# Altium PCB Сharger for auto (2).PcbDoc
Units mm, origin at the board's own origin, x right, y up, seen from the top; angles counter-clockwise.
Board outline 35.56 x 29.46 mm, 2 copper layers (Top Layer, Bottom Layer); 17 components, 20 nets, 60 pads, 0 vias.
Unrouted connection lines stored in the file: 19.
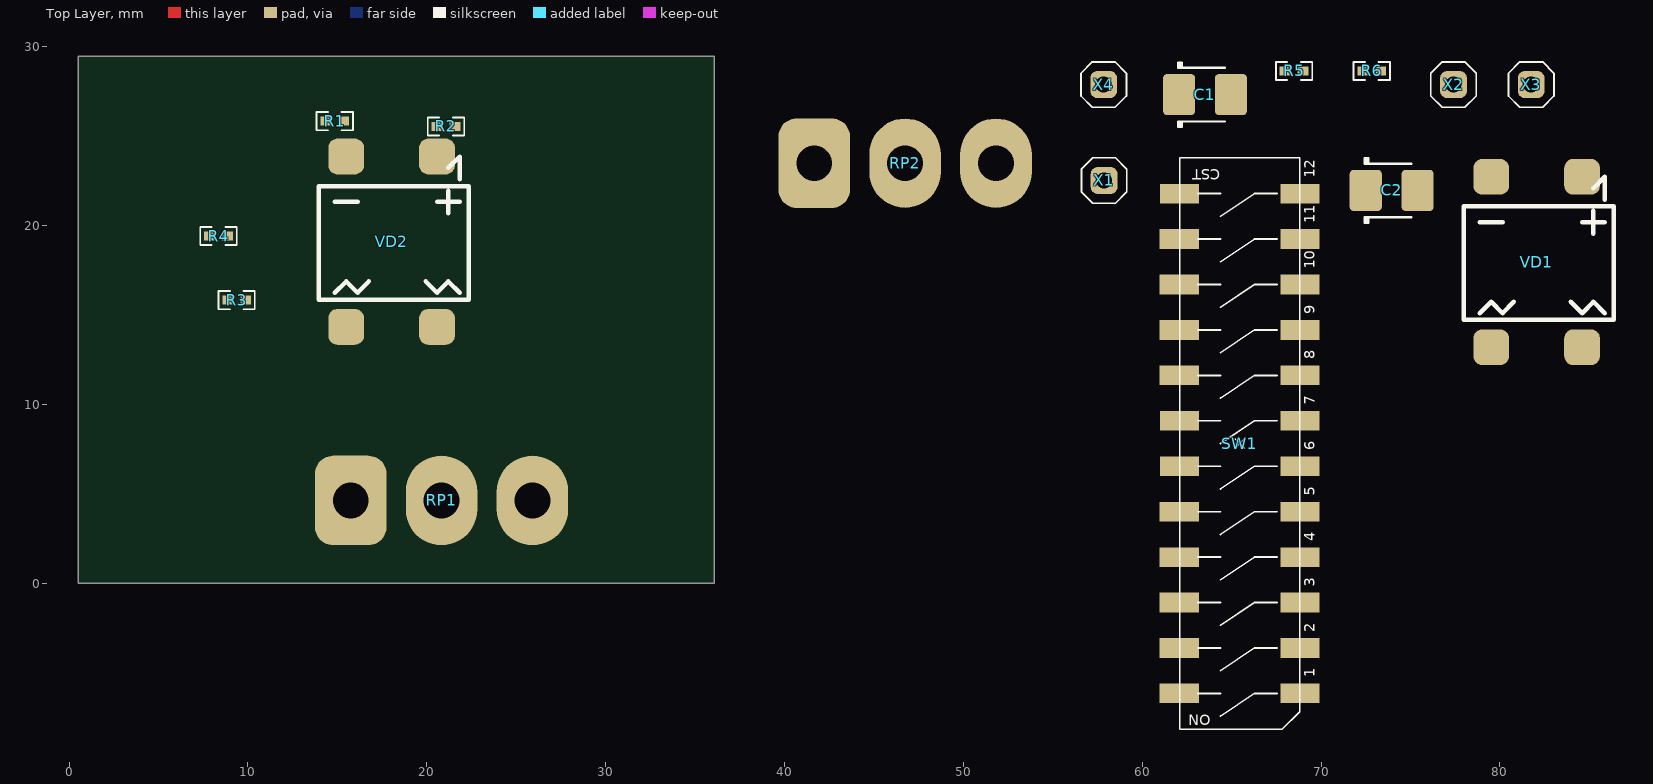
[diagram p0: Top Layer view]
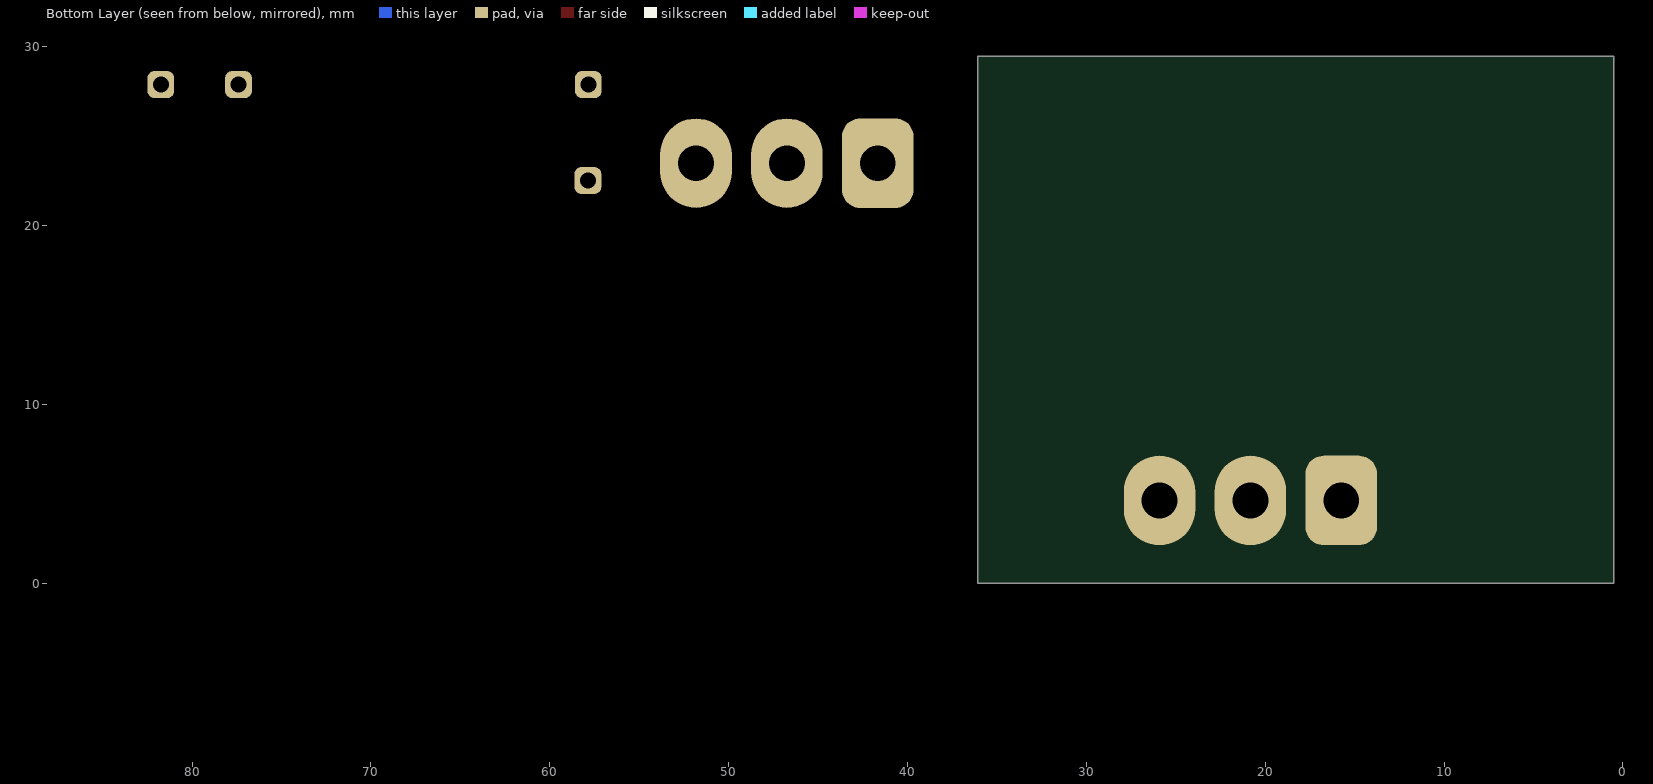
[diagram p1: Bottom Layer view, seen from below]

## Layer stack, top to bottom
Top Solder: solder mask 0.0102, Solder Resist, Dk 3.5
Top Layer: signal copper 0.0356
Dielectric 1: dielectric 0.32, FR-4, Dk 4.8
Bottom Layer: signal copper 0.0356
Bottom Solder: solder mask 0.0102, Solder Resist, Dk 3.5

## Board outline
0.508,0 0.508,29.464 36.068,29.464 36.068,0

## Design rules (kind name [scope] priority, off if disabled: settings)
Clearance InPoly [InPoly] p1: gap=0.25 ignorepadtopadclearanceinfootprint=FALSE except(0: Arc-Hole Track-Hole SMDPad-Hole THPad-Hole Via-Hole Fill-Hole Poly-Hole Region-Hole Text-Hole)
Clearance [All] p2: gap=0.15 ignorepadtopadclearanceinfootprint=FALSE except(0: Arc-Hole Track-Hole SMDPad-Hole THPad-Hole Via-Hole Fill-Hole Poly-Hole Region-Hole Text-Hole)
PolygonConnect [All] p1: connectstyle=Relief reliefconductorwidth=0.254 reliefentries=4 polygonreliefangle="90 Angle" airgapwidth=0.254
RoutingVias [All] p1: holewidth=0.5 width=0.7 viastyle="Through Hole" minholewidth=0.3 minwidth=0.5 maxholewidth=1 maxwidth=1.5
SolderMaskExpansion [All] p1: expansion=0.102
Width [All] p1: maxlimit=0.5 minlimit=0.15 preferedwidth=0.25
30 further rules are at their usual default settings.

## Components (designator, comment, footprint, x,y, rotation, side; value= is the part's Value field where it differs from the comment)
C1 "4700uf 50V" CAPMP3528X210N 63.508,27.313 r0 top
C2 "4700uf 50V" CAPMP3528X210N 73.948,21.954 r0 top
R1 "RESC1005(0402)" "REZKemet 0402" 14.859,25.832 r0 top
R2 "RESC1005(0402)" "REZKemet 0402" 21.074,25.532 r180 top
R3 "RESC1005(0402)" "REZKemet 0402" 9.373,15.824 r0 top
R4 "RESC1005(0402)" "REZKemet 0402" 8.357,19.406 r0 top
R5 "0" "REZKemet 0402" 68.487,28.634 r0 top
R6 "0" "REZKemet 0402" 72.83,28.634 r0 top
RP1 "CC" POT16K1-LIN 20.828,4.623 r0 top
RP2 "CV" POT16K1-LIN 46.744,23.478 r0 top
SW1 "219-12MST" 219-12MST 68.817,-6.164 r90 top
VD1 "Bridge3" DF206ST-G 79.51,13.191 r0 top
VD2 "Bridge3" DF206ST-G 15.494,14.326 r0 top
X1 "X1-PLS-1" HoleSolderPLS-1 57.869,22.513 r0 top
X2 "X1-PLS-1" HoleSolderPLS-1 77.402,27.872 r0 top
X3 "X1-PLS-1" HoleSolderPLS-1 81.745,27.872 r0 top
X4 "X1-PLS-1" HoleSolderPLS-1 57.844,27.872 r0 top

## Footprints (in the part's own frame and the unit in brackets; to place one, negate y for a bottom-side part, rotate by r counter-clockwise, add the part's x,y. Pads: shape width x height; smd on the part's side, far side on the other; paste and mask are expansions set on the pad)
219-12MST [mm] "SWITCH SLIDE DIP SPST 100MA 20V"
  rect 1.1x2.2 smd: 1(0,0) 2(0,6.74) 3(2.54,0) 4(2.54,6.74) 5(5.08,0) 6(5.08,6.74) 7(7.62,0) 8(7.62,6.74) 9(10.16,0) 10(10.16,6.74) 11(12.7,0) 12(12.7,6.73) 13(15.24,0) 14(15.24,6.73) 15(17.78,0) 16(17.78,6.74) 17(20.32,0) 18(20.32,6.74) 19(22.86,0) 20(22.86,6.74) 21(25.4,0) 22(25.4,6.74) 23(27.94,0) 24(27.94,6.73)
  silkscreen extent -2,0.01 29.94,6.71
CAPMP3528X210N [mm] "Molded body capacitor, Body 3.5x2.8mm, 1210, IPC Nominal settings"
  round 0.254 on Mech15: 0(0,0)
  rrect25% 1.8x2.3 smd: 1(-1.45,0) 2(1.45,0)
  Top Layer pour cut-out: -0.508,1.27 0.508,1.27 0.508,-1.27 -0.508,-1.27
  silkscreen extent -1.5,-1.8 1.1,1.8, body extent -1.75,-1.4 1.75,1.4, height 2.1
DF206ST-G [mm] "SMD Glass Passivated Bridge Rectifiers, 600V 2A, Package DFS"
  rrect50% 2x2 smd: 1(5.08,9.525) 2(0,9.525) 3(0,0) 4(5.08,0)
  silkscreen extent -1.52,1.52 6.86,9.53, body extent -1.5,-0.5 6.7,9.8, height 2.61
HoleSolderPLS-1 [mm] "Connector; Header; 1 Position"
  rrect50% 1.5x1.5 hole 0.9: 1(0,0)
  silkscreen extent -1.27,-1.27 1.27,1.27
POT16K1-LIN [mm]
  rrect50% 4x5 hole 2: 1(-5.08,0)
  oval 4x5 hole 2: 2(0,0) 3(5.08,0)
  body extent -8.25,-18.41 8.51,5.71, height 21.38
"REZKemet 0402" [mm] "Chip Capacitor, Body 1.0x0.5mm, IPC High Density"
  rect 0.6x0.5 smd: 1(-0.5,0) 2(0.5,0)
  silkscreen extent -1.02,-0.51 1.02,0.51, body extent -0.5,-0.3 0.5,0.3, height 0.2

## Part data
C1 C2: library part CapTantB, "?", Digi-Key Part Number=478-5801-1-ND, Manufacturer Part Number=TAJB107M010RNJ, Code_JEDEC="1411 B", HelpURL=https://www.digikey.com/product-detail/en/avx-corporation/TAJB107M010RNJ/478-5801-1-ND/2136392, Note=?, Part Number=CapTantB, Price$=0.71
R1 R2 R3 R4: Digi-Key Part Number=???, Code_JEDEC=???, HelpURL=???, Manufacturer Part Number=???, Note=???, Part Number=RESC1005(0402), Price$=???
R5 R6: library part RESC1005(0402), Digi-Key Part Number=???, Code_JEDEC=???, HelpURL=???, Manufacturer Part Number=???, Note=???, Part Number=RESC1005(0402), Price$=???
RP1 RP2: library part "50k POT16K1-LIN", Digi-Key Part Number=???, Code_JEDEC=???, HelpURL=???, Manufacturer Part Number=???, Note=???, Part Number="50k POT16K1-LIN", Price$=???
SW1: "SWITCH SLIDE DIP SPST 100MA 20V", Digi-Key Part Number=CT21912MST-ND, Code_JEDEC=???, HelpURL=https://www.digikey.com/product-detail/en/cts-electrocomponents/219-12MST/CT21912MST-ND/223218, Manufacturer Part Number=219-12MST, Note=???, Part Number=219-12MST, Price$=1.38
VD1 VD2: library part DF10S-E3/77, "Miniature Glass Passivated Single-Phase / Surface Mount Bridge Rectifiers", Manufacturer Part Number=?, Code_JEDEC=?, HelpURL=https://ru.mouser.com/datasheet/2/427/dfs-240405.pdf, Note=?, Part Number=DF10S-E3/77, Price$=?
X1 X2 X3 X4: "контакт под пайку", Part Number=X1-PLS-1

## Nets (pads, with @x,y where several pads share a name; then routed paths per layer and width w, separated by ;. In a path a pad name is that pad's centre, name@x,y a point inside that pad or via, vN(x,y) a via of type N, cw(c..) or ccw(c..) an arc to the next point about the centre after c; other vN are vias at no path point)
GND: C1.2 C2.2 RP1.1 RP2.1 VD1.2 VD2.2 X4.1
NetC1_1: C1.1 VD2.1
NetC2_1: C2.1 VD1.1
NetHL1_A: R5.1
NetHL2_A: R6.1
NetR1_1: R1.2 R2.2 R3.2 R4.2
NetR1_2: R1.1 R2.1 R3.1 R4.1
NetR5_2: R5.2 R6.2 X3.1
NetRP1_2: RP1.2 RP1.3
NetRP2_2: RP2.2 RP2.3
NetSW1_1: SW1.1 X1.1
NetSW1_2: SW1.2
NetT1_2: X2.1
NetT1_3: 
NetT1_11: VD2.4
NetT1_12: 
NetT1_14: VD2.3
NetT1_15: VD1.4
NetT1_16: 
NetT1_22: VD1.3
pads on no net: C1.0 C2.0 SW1.3 SW1.4 SW1.5 SW1.6 SW1.7 SW1.8 SW1.9 SW1.10 SW1.11 SW1.12 SW1.13 SW1.14 SW1.15 SW1.16 SW1.17 SW1.18 SW1.19 SW1.20 SW1.21 SW1.22 SW1.23 SW1.24

## Text inside footprints (layer, text, board x,y; h text height)
SW1: Top Overlay "ON" at 63.817,-7.164 h1 r180; Top Overlay "CST" at 64.372,23.336 h1 r180; Top Overlay "1" at 69.833,-5.275 h1 r90; Top Overlay "2" at 69.833,-2.735 h1 r90; Top Overlay "3" at 69.833,-0.195 h1 r90; Top Overlay "4" at 69.833,2.345 h1 r90; Top Overlay "5" at 69.833,4.885 h1 r90; Top Overlay "6" at 69.833,7.425 h1 r90; Top Overlay "7" at 69.833,9.965 h1 r90; Top Overlay "8" at 69.833,12.505 h1 r90; Top Overlay "9" at 69.833,15.045 h1 r90; Top Overlay "10" at 69.833,17.585 h1 r90; Top Overlay "11" at 69.833,20.125 h1 r90; Top Overlay "12" at 69.833,22.665 h1 r90